# Altium PCB PCB3.PcbDoc
Units mm, origin at the board's own origin, x right, y up, seen from the top; angles counter-clockwise.
Board outline 100 x 50 mm, 2 copper layers (Top Layer, Bottom Layer); 107 components, 56 nets, 288 pads, 0 vias.
Unrouted connection lines stored in the file: 218.
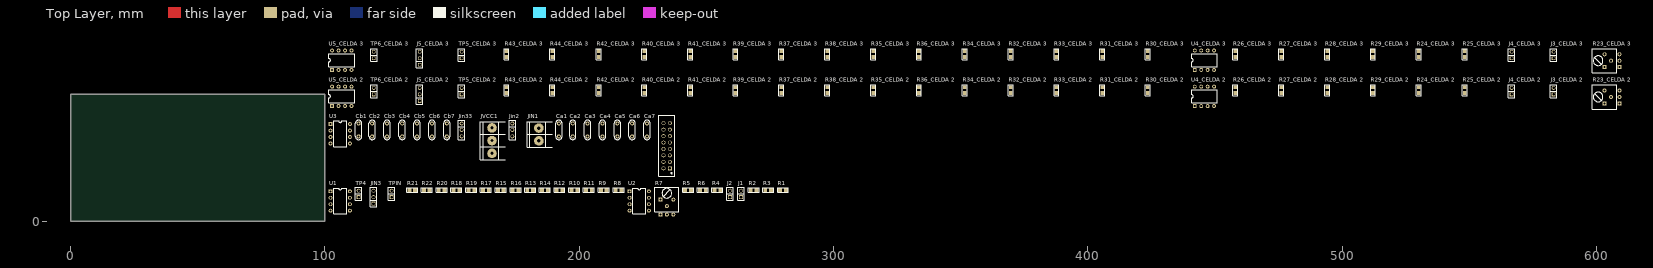
[diagram p0: Top Layer view]
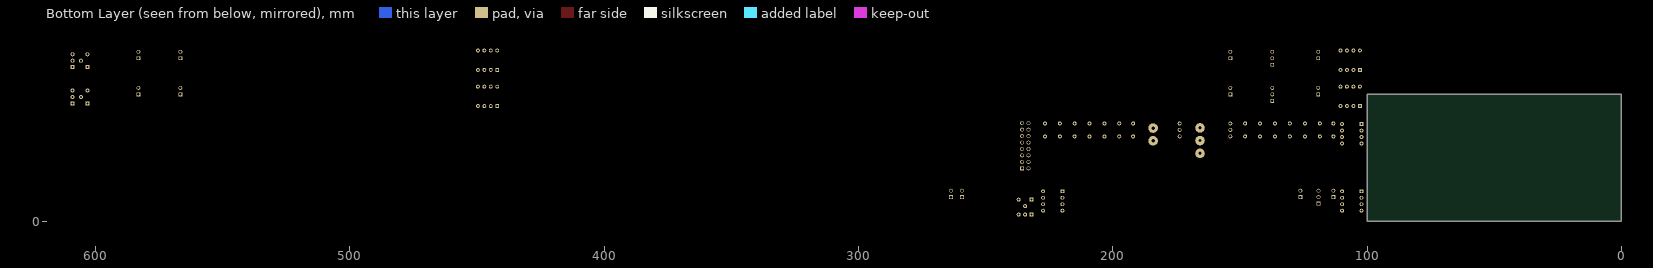
[diagram p1: Bottom Layer view, seen from below]

## Layer stack, top to bottom
Top Solder: solder mask 0.0102, Solder Resist, Dk 3.5
Top Layer: signal copper 0.0356
Dielectric 1: dielectric 0.32, FR-4, Dk 4.8
Bottom Layer: signal copper 0.0356
Bottom Solder: solder mask 0.0102, Solder Resist, Dk 3.5

## Board outline
0,0 0,50 100,50 100,0

## Design rules (kind name [scope] priority, off if disabled: settings)
Clearance [All] p1: gap=0.254 ignorepadtopadclearanceinfootprint=FALSE except(0: Arc-Hole Track-Hole SMDPad-Hole THPad-Hole Via-Hole Fill-Hole Poly-Hole Region-Hole Text-Hole)
PolygonConnect [All] p1: connectstyle=Relief reliefconductorwidth=0.254 reliefentries=4 polygonreliefangle="90 Angle" airgapwidth=0.254
RoomDefinition filter [InComponentClass('filter')] p1: confinementstyle=ConfineIn formatcopy=TRUE lockcomponents=FALSE outline 101.219,17.399 237.871,17.399 237.871,42.545 101.219,42.545
RoomDefinition "CELDA 3" [InComponentClass('CELDA 3')] p2: confinementstyle=ConfineIn formatcopy=TRUE lockcomponents=FALSE outline 101.092,58.166 615.315,58.166 615.315,70.993 101.092,70.993
RoomDefinition "CELDA 2" [InComponentClass('CELDA 2')] p3: confinementstyle=ConfineIn formatcopy=TRUE lockcomponents=FALSE outline 101.092,43.942 615.315,43.942 615.315,56.769 101.092,56.769
RoomDefinition "CELDA 1" [InComponentClass('CELDA 1')] p4: confinementstyle=ConfineIn formatcopy=TRUE lockcomponents=FALSE outline 101.219,1.651 282.575,1.651 282.575,16.129 101.219,16.129
RoutingVias [All] p1: holewidth=0.711 width=1.27 viastyle="Through Hole" minholewidth=0.711 minwidth=1.27 maxholewidth=0.711 maxwidth=1.27
SolderMaskExpansion [All] p1: expansion=0.102
Width [All] p1: maxlimit=0.254 minlimit=0.254 preferedwidth=0.254
30 further rules are at their usual default settings.

## Classes and differential pairs
channel class fleischerTowR3: "CELDA 2" "CELDA 3"
component class filter: Ca1 Ca2 Ca3 Ca4 Ca5 Ca6 Ca7 Cb1 Cb2 Cb3 Cb4 Cb5 Cb6 Cb7 JIN1 Jin2 Jin33 JVCC1 U3 ""
component class "CELDA 3": "J3_CELDA 3" "J4_CELDA 3" "J5_CELDA 3" "R23_CELDA 3" "R24_CELDA 3" "R25_CELDA 3" "R26_CELDA 3" "R27_CELDA 3" "R28_CELDA 3" "R29_CELDA 3" "R30_CELDA 3" "R31_CELDA 3" "R32_CELDA 3" "R33_CELDA 3" "R34_CELDA 3" "R35_CELDA 3" "R36_CELDA 3" "R37_CELDA 3" "R38_CELDA 3" "R39_CELDA 3" "R40_CELDA 3" "R41_CELDA 3" "R42_CELDA 3" "R43_CELDA 3" "R44_CELDA 3" "TP5_CELDA 3" "TP6_CELDA 3" "U4_CELDA 3" "U5_CELDA 3"
component class "CELDA 2": "J3_CELDA 2" "J4_CELDA 2" "J5_CELDA 2" "R23_CELDA 2" "R24_CELDA 2" "R25_CELDA 2" "R26_CELDA 2" "R27_CELDA 2" "R28_CELDA 2" "R29_CELDA 2" "R30_CELDA 2" "R31_CELDA 2" "R32_CELDA 2" "R33_CELDA 2" "R34_CELDA 2" "R35_CELDA 2" "R36_CELDA 2" "R37_CELDA 2" "R38_CELDA 2" "R39_CELDA 2" "R40_CELDA 2" "R41_CELDA 2" "R42_CELDA 2" "R43_CELDA 2" "R44_CELDA 2" "TP5_CELDA 2" "TP6_CELDA 2" "U4_CELDA 2" "U5_CELDA 2"
component class "CELDA 1": J1 J2 JIN3 R1 R2 R3 R4 R5 R6 R7 R8 R9 R10 R11 R12 R13 R14 R15 R16 R17 R18 R19 R20 R21 R22 TP4 TPIN U1 U2

## Components (designator, comment, footprint, x,y, rotation, side; value= is the part's Value field where it differs from the comment)
Ca1 "CAP" CAP200 192.024,35.941 r90 top
Ca2 "CAP" CAP200 197.485,35.941 r90 top
Ca3 "CAP" CAP200 203.327,35.941 r90 top
Ca4 "CAP" CAP200 209.169,35.941 r90 top
Ca5 "CAP" CAP200 215.011,35.941 r90 top
Ca6 "CAP" CAP200 220.853,35.941 r90 top
Ca7 "CAP" CAP200 226.695,35.941 r90 top
Cb1 "CAP" CAP200 113.284,35.941 r90 top
Cb2 "CAP" CAP200 118.618,35.941 r90 top
Cb3 "CAP" CAP200 124.46,35.941 r90 top
Cb4 "CAP" CAP200 130.429,35.941 r90 top
Cb5 "CAP" CAP200 136.271,35.941 r90 top
Cb6 "CAP" CAP200 142.113,35.941 r90 top
Cb7 "CAP" CAP200 147.955,35.941 r90 top
J1 "C2" SIP2 263.652,10.795 r90 top
J2 "C1" SIP2 259.334,10.795 r90 top
"J3_CELDA 2" "C2" SIP2 583.184,51.181 r90 top (schematic designator J3)
"J3_CELDA 3" "C2" SIP2 583.184,65.405 r90 top (schematic designator J3)
"J4_CELDA 2" "C1" SIP2 566.674,51.181 r90 top (schematic designator J4)
"J4_CELDA 3" "C1" SIP2 566.674,65.405 r90 top (schematic designator J4)
"J5_CELDA 2" "JUMPER" JUMPER3 137.287,49.911 r90 top (schematic designator J5)
"J5_CELDA 3" "JUMPER" JUMPER3 137.287,64.135 r90 top (schematic designator J5)
JIN1 "BORNERA 2" BORNERA2 184.15,34.163 r0 top
Jin2 "JUMPER" JUMPER3TH 173.736,38.481 r0 top
JIN3 "JUMPER" JUMPER3 119.126,9.525 r90 top
Jin33 "JUMPER" JUMPER3TH 153.797,38.481 r0 top
JVCC1 "BORNERA 3" BORNERA3 165.735,31.75 r0 top
R1 "RES" 0805 280.162,12.319 r0 top
R2 "RES" 0805 268.605,12.319 r0 top
R3 "RES" 0805 274.32,12.319 r0 top
R4 "RES" 0805 254.381,12.319 r0 top
R5 "RES" 0805 242.824,12.319 r0 top
R6 "RES" 0805 248.666,12.319 r0 top
R7 "PRESET" "PRESET H" 234.442,8.509 r0 top
R8 "RES" 0805 215.519,12.319 r0 top
R9 "RES" 0805 209.677,12.319 r0 top
R10 "RES" 0805 198.12,12.319 r0 top
R11 "RES" 0805 203.835,12.319 r0 top
R12 "RES" 0805 192.278,12.319 r0 top
R13 "RES" 0805 180.721,12.319 r0 top
R14 "RES" 0805 186.563,12.319 r0 top
R15 "RES" 0805 169.164,12.319 r0 top
R16 "RES" 0805 175.006,12.319 r0 top
R17 "RES" 0805 163.322,12.319 r0 top
R18 "RES" 0805 151.765,12.319 r0 top
R19 "RES" 0805 157.607,12.319 r0 top
R20 "RES" 0805 145.923,12.319 r0 top
R21 "RES" 0805 134.366,12.319 r0 top
R22 "RES" 0805 140.081,12.319 r0 top
"R23_CELDA 2" "PRESET" "PRESET H" 603.25,48.895 r90 top (schematic designator R23)
"R23_CELDA 3" "PRESET" "PRESET H" 603.25,63.119 r90 top (schematic designator R23)
"R24_CELDA 2" "RES" 0805 530.225,51.562 r90 top (schematic designator R24)
"R24_CELDA 3" "RES" 0805 530.225,65.786 r90 top (schematic designator R24)
"R25_CELDA 2" "RES" 0805 548.259,51.562 r90 top (schematic designator R25)
"R25_CELDA 3" "RES" 0805 548.259,65.786 r90 top (schematic designator R25)
"R26_CELDA 2" "RES" 0805 458.089,51.562 r90 top (schematic designator R26)
"R26_CELDA 3" "RES" 0805 458.089,65.786 r90 top (schematic designator R26)
"R27_CELDA 2" "RES" 0805 476.123,51.562 r90 top (schematic designator R27)
"R27_CELDA 3" "RES" 0805 476.123,65.786 r90 top (schematic designator R27)
"R28_CELDA 2" "RES" 0805 494.157,51.562 r90 top (schematic designator R28)
"R28_CELDA 3" "RES" 0805 494.157,65.786 r90 top (schematic designator R28)
"R29_CELDA 2" "RES" 0805 512.191,51.562 r90 top (schematic designator R29)
"R29_CELDA 3" "RES" 0805 512.191,65.786 r90 top (schematic designator R29)
"R30_CELDA 2" "RES" 0805 423.545,51.562 r90 top (schematic designator R30)
"R30_CELDA 3" "RES" 0805 423.545,65.786 r90 top (schematic designator R30)
"R31_CELDA 2" "RES" 0805 405.765,51.562 r90 top (schematic designator R31)
"R31_CELDA 3" "RES" 0805 405.765,65.786 r90 top (schematic designator R31)
"R32_CELDA 2" "RES" 0805 369.697,51.562 r90 top (schematic designator R32)
"R32_CELDA 3" "RES" 0805 369.697,65.786 r90 top (schematic designator R32)
"R33_CELDA 2" "RES" 0805 387.731,51.562 r90 top (schematic designator R33)
"R33_CELDA 3" "RES" 0805 387.731,65.786 r90 top (schematic designator R33)
"R34_CELDA 2" "RES" 0805 351.663,51.562 r90 top (schematic designator R34)
"R34_CELDA 3" "RES" 0805 351.663,65.786 r90 top (schematic designator R34)
"R35_CELDA 2" "RES" 0805 315.595,51.562 r90 top (schematic designator R35)
"R35_CELDA 3" "RES" 0805 315.595,65.786 r90 top (schematic designator R35)
"R36_CELDA 2" "RES" 0805 333.629,51.562 r90 top (schematic designator R36)
"R36_CELDA 3" "RES" 0805 333.629,65.786 r90 top (schematic designator R36)
"R37_CELDA 2" "RES" 0805 279.527,51.562 r90 top (schematic designator R37)
"R37_CELDA 3" "RES" 0805 279.527,65.786 r90 top (schematic designator R37)
"R38_CELDA 2" "RES" 0805 297.561,51.562 r90 top (schematic designator R38)
"R38_CELDA 3" "RES" 0805 297.561,65.786 r90 top (schematic designator R38)
"R39_CELDA 2" "RES" 0805 261.493,51.562 r90 top (schematic designator R39)
"R39_CELDA 3" "RES" 0805 261.493,65.786 r90 top (schematic designator R39)
"R40_CELDA 2" "RES" 0805 225.679,51.562 r90 top (schematic designator R40)
"R40_CELDA 3" "RES" 0805 225.679,65.786 r90 top (schematic designator R40)
"R41_CELDA 2" "RES" 0805 243.713,51.562 r90 top (schematic designator R41)
"R41_CELDA 3" "RES" 0805 243.713,65.786 r90 top (schematic designator R41)
"R42_CELDA 2" "RES" 0805 207.645,51.562 r90 top (schematic designator R42)
"R42_CELDA 3" "RES" 0805 207.645,65.786 r90 top (schematic designator R42)
"R43_CELDA 2" "RES" 0805 171.45,51.562 r90 top (schematic designator R43)
"R43_CELDA 3" "RES" 0805 171.45,65.786 r90 top (schematic designator R43)
"R44_CELDA 2" "RES" 0805 189.484,51.562 r90 top (schematic designator R44)
"R44_CELDA 3" "RES" 0805 189.484,65.786 r90 top (schematic designator R44)
TP4 "JUMPER" JUMPER2 113.284,10.795 r90 top
"TP5_CELDA 2" "JUMPER" JUMPER2 153.797,51.181 r90 top (schematic designator TP5)
"TP5_CELDA 3" "JUMPER" JUMPER2 153.797,65.405 r90 top (schematic designator TP5)
"TP6_CELDA 2" "JUMPER" JUMPER2 119.253,51.181 r90 top (schematic designator TP6)
"TP6_CELDA 3" "JUMPER" JUMPER2 119.253,65.405 r90 top (schematic designator TP6)
TPIN "JUMPER" JUMPER2 126.238,10.795 r90 top
U1 "LM833" DIP8 102.235,11.811 r0 top
U2 "LM833" DIP8 219.837,11.811 r0 top
U3 "LM833" DIP8 102.235,38.227 r0 top
"U4_CELDA 2" "LM833" DIP8 442.087,45.339 r90 top (schematic designator U4)
"U4_CELDA 3" "LM833" DIP8 442.087,59.563 r90 top (schematic designator U4)
"U5_CELDA 2" "LM833" DIP8 102.87,45.339 r90 top (schematic designator U5)
"U5_CELDA 3" "LM833" DIP8 102.87,59.563 r90 top (schematic designator U5)
? "OUTPUT" SIP8*2 235.712,20.828 r90 top

## Footprints (in the part's own frame and the unit in brackets; to place one, negate y for a bottom-side part, rotate by r counter-clockwise, add the part's x,y. Pads: shape width x height; smd on the part's side, far side on the other; paste and mask are expansions set on the pad)
0805 [mil] "Pasivo 0805"
  rect 60x56 smd: 1(-45,0) 2(45,0)
  silkscreen extent -85,-38 85,38, body extent -40,-24 39,25, height 15
BORNERA2 [mm] "Bornera con Tornillos 5mm separación"
  round 3.75 hole 1.3: 1(0,2.5) 2(0,-2.5)
  silkscreen extent -4.6,-5 5.2,5, body extent -3.76,-4.89 3.94,5.61, height 10
BORNERA3 [mm] "Bornera con Tornillos 5mm separación"
  round 3.75 hole 1.3: 1(0,5) 2(0,0) 3(0,-5)
  silkscreen extent -4.6,-7.5 5.2,7.5, body extent -3.76,-7.39 3.94,8.11, height 10.05
CAP200 [mil]
  round 62 hole 32: 1(-100,0) 2(100,0)
  silkscreen extent -150,-50 150,50, body extent -110,-46 110,44, height 246
DIP8 [mil]
  rect 60x60 hole 32: 1(0,0)
  round 60 hole 32: 2(0,-100) 3(0,-200) 4(0,-300) 5(300,-300) 6(300,-200) 7(300,-100) 8(300,0)
  silkscreen extent 50,-350 250,50, body extent -3,-363 303,63, height 177
JUMPER2 [mm]
  rect 1.5x1.5 hole 1.016: 1(-1.27,0)
  round 1.5 hole 1.016: 2(1.27,0)
  silkscreen extent -2.54,-1.27 2.54,1.27, body extent -2.46,-1.27 2.54,1.27, height 9.5
JUMPER3 [mm]
  rect 1.5x1.5 hole 1.016: 1(-2.54,0)
  round 1.5 hole 1.016: 2(0,0) 3(2.54,0)
  silkscreen extent -3.81,-1.27 3.81,1.27, body extent -3.81,-1.3 3.81,1.27, height 16.15
JUMPER3TH [mil]
  round 60 hole 38: 1(0,0) 2(0,-100) 3(0,-200)
  silkscreen extent -50,-250 50,50, body extent -49,-250 51,50, height 330
"PRESET H" [mil]
  rect 62x62 hole 32: 1(-98.43,-230) 1(-98.42,0)
  round 62 hole 32: 2(1.57,-230) 2(1.57,-100) 3(101.57,-230) 3(101.57,0)
  silkscreen extent -186,-185 189,190, body extent -190,-188 185,188, height 197
SIP2 [mm]
  rect 1.5x1.5 hole 1.016: 1(-1.27,0)
  round 1.5 hole 1.016: 2(1.27,0)
  silkscreen extent -2.54,-1.27 2.54,1.27
SIP8*2 [mm]
  rect 1.5x1.5 hole 1.016: 1(0,0)
  round 1.5 hole 1.016: 2(0,2.54) 3(2.54,0) 4(2.54,2.54) 5(5.08,0) 6(5.08,2.54) 7(7.62,0) 8(7.62,2.54) 9(10.16,0) 10(10.16,2.54) 11(12.7,0) 12(12.7,2.54) 13(15.24,0) 14(15.24,2.54) 15(17.78,0) 16(17.78,2.54)
  silkscreen extent -3.18,-1.91 20.95,4.45, body extent -1.26,-1.3 19.06,3.78, height 10.1

## Part data
J1 J2 "J3_CELDA 2" "J3_CELDA 3" "J4_CELDA 2" "J4_CELDA 3": library part CON2
"J5_CELDA 2" "J5_CELDA 3" JIN3: library part JUMPER3
Jin2 Jin33: library part JUMPER3TH, "TIRA DE PINES 1x3"
U1 U2 U3 "U4_CELDA 2" "U4_CELDA 3" "U5_CELDA 2" "U5_CELDA 3": "Dual Audio Operational Amplifier"
?: library part CON8*2

## Nets (pads, with @x,y where several pads share a name; then routed paths per layer and width w, separated by ;. In a path a pad name is that pad's centre, name@x,y a point inside that pad or via, vN(x,y) a via of type N, cw(c..) or ccw(c..) an arc to the next point about the centre after c; other vN are vias at no path point)
GND: "U4_CELDA 2.3" "U4_CELDA 2.5" "U4_CELDA 3.3" "U4_CELDA 3.5" "U5_CELDA 2.5" "U5_CELDA 3.5" ?.13 ?.14 ?.15 ?.16 Ca1.2 Ca2.2 Ca3.2 Ca4.2 Ca5.2 Ca6.2 Ca7.2 Cb1.2 Cb2.2 Cb3.2 Cb4.2 Cb5.2 Cb6.2 Cb7.2 JIN1.2 JVCC1.2 U1.5 U2.3 U2.5 U3.5
NetCb2_1: Cb2.1 Cb3.1 Cb4.1 Cb5.1 Cb6.1 Cb7.1
NetJ1_1: J1.1 R8.2 R11.2 R20.2 R22.2 U2.2
NetJ1_2: J1.2 R1.2 R3.2 U2.1
NetJ2_1: J2.1 R1.1 R2.1
NetJ2_2: J2.2 R7.3
"NetJ3_CELDA 2_1": "J3_CELDA 2.1" "R30_CELDA 2.2" "R33_CELDA 2.2" "R42_CELDA 2.2" "R44_CELDA 2.2" "U4_CELDA 2.2"
"NetJ3_CELDA 2_2": "J3_CELDA 2.2" "R23_CELDA 2.3" "U4_CELDA 2.1"
"NetJ3_CELDA 3_1": "J3_CELDA 3.1" "R30_CELDA 3.2" "R33_CELDA 3.2" "R42_CELDA 3.2" "R44_CELDA 3.2" "U4_CELDA 3.2"
"NetJ3_CELDA 3_2": "J3_CELDA 3.2" "R23_CELDA 3.3" "U4_CELDA 3.1"
"NetJ4_CELDA 2_1": "J4_CELDA 2.1" "R23_CELDA 2.2" "R24_CELDA 2.1" "R26_CELDA 2.1" "R34_CELDA 2.2" "R38_CELDA 2.2" "U5_CELDA 2.6"
"NetJ4_CELDA 2_2": "J4_CELDA 2.2" "R24_CELDA 2.2" "R27_CELDA 2.2"
"NetJ4_CELDA 3_1": "J4_CELDA 3.1" "R23_CELDA 3.2" "R24_CELDA 3.1" "R26_CELDA 3.1" "R34_CELDA 3.2" "R38_CELDA 3.2" "U5_CELDA 3.6"
"NetJ4_CELDA 3_2": "J4_CELDA 3.2" "R24_CELDA 3.2" "R27_CELDA 3.2"
"NetJ5_CELDA 2_1": "J5_CELDA 2.1" "TP6_CELDA 2.1" "TP6_CELDA 2.2" "U5_CELDA 2.1" "U5_CELDA 2.2"
"NetJ5_CELDA 3_1": "J5_CELDA 3.1" "TP6_CELDA 3.1" "TP6_CELDA 3.2" "U5_CELDA 3.1" "U5_CELDA 3.2"
NetJIN3_1: JIN3.1 TP4.1 TP4.2 U1.1 U1.2
NetR2_2: R2.2 R3.1
NetR4_1: R4.1 R5.1 R9.2 R14.2 R17.2 R19.2 U2.6
NetR5_2: R5.2 R6.1
NetR7_2: R7.2 R12.2 R16.2 U1.6
NetR9_1: R9.1 R13.1 U1.7
NetR10_2: R10.2 R11.1
NetR13_2: R13.2 R14.1
NetR15_2: R15.2 R16.1
NetR18_2: R18.2 R19.1
NetR21_2: R21.2 R22.1
"NetR25_CELDA 2_1": "R25_CELDA 2.1" "R28_CELDA 2.1" "R31_CELDA 2.2" "R36_CELDA 2.2" "R39_CELDA 2.2" "R41_CELDA 2.2" "U4_CELDA 2.6"
"NetR25_CELDA 3_1": "R25_CELDA 3.1" "R28_CELDA 3.1" "R31_CELDA 3.2" "R36_CELDA 3.2" "R39_CELDA 3.2" "R41_CELDA 3.2" "U4_CELDA 3.6"
"NetR26_CELDA 2_2": "R26_CELDA 2.2" "R27_CELDA 2.1"
"NetR26_CELDA 3_2": "R26_CELDA 3.2" "R27_CELDA 3.1"
"NetR28_CELDA 2_2": "R28_CELDA 2.2" "R29_CELDA 2.1"
"NetR28_CELDA 3_2": "R28_CELDA 3.2" "R29_CELDA 3.1"
"NetR31_CELDA 2_1": "R31_CELDA 2.1" "R35_CELDA 2.1" "U5_CELDA 2.7"
"NetR31_CELDA 3_1": "R31_CELDA 3.1" "R35_CELDA 3.1" "U5_CELDA 3.7"
"NetR32_CELDA 2_2": "R32_CELDA 2.2" "R33_CELDA 2.1"
"NetR32_CELDA 3_2": "R32_CELDA 3.2" "R33_CELDA 3.1"
"NetR35_CELDA 2_2": "R35_CELDA 2.2" "R36_CELDA 2.1"
"NetR35_CELDA 3_2": "R35_CELDA 3.2" "R36_CELDA 3.1"
"NetR37_CELDA 2_2": "R37_CELDA 2.2" "R38_CELDA 2.1"
"NetR37_CELDA 3_2": "R37_CELDA 3.2" "R38_CELDA 3.1"
"NetR40_CELDA 2_2": "R40_CELDA 2.2" "R41_CELDA 2.1"
"NetR40_CELDA 3_2": "R40_CELDA 3.2" "R41_CELDA 3.1"
"NetR43_CELDA 2_2": "R43_CELDA 2.2" "R44_CELDA 2.1"
"NetR43_CELDA 3_2": "R43_CELDA 3.2" "R44_CELDA 3.1"
NetU3_6: U3.6 U3.7
VCC: "U4_CELDA 2.8" "U4_CELDA 3.8" "U5_CELDA 2.8" "U5_CELDA 3.8" Ca1.1 Ca2.1 Ca3.1 Ca4.1 Ca5.1 Ca6.1 Ca7.1 JVCC1.1 U1.8 U2.8 U3.8
VEE: "U4_CELDA 2.4" "U4_CELDA 3.4" "U5_CELDA 2.4" "U5_CELDA 3.4" Cb1.1 JVCC1.3 U1.4 U2.4 U3.4
Vi2: "J5_CELDA 2.3" "TP5_CELDA 2.1" "TP5_CELDA 2.2" "U5_CELDA 2.3" Jin2.2
Vi3: "J5_CELDA 3.3" "TP5_CELDA 3.1" "TP5_CELDA 3.2" "U5_CELDA 3.3" Jin33.2
VIN: JIN1.1 Jin2.1 JIN3.3 Jin33.1 TPIN.1 TPIN.2 U1.3
VinFT: "J5_CELDA 2.2" "J5_CELDA 3.2" "R34_CELDA 2.1" "R34_CELDA 3.1" "R37_CELDA 2.1" "R37_CELDA 3.1" "R39_CELDA 2.1" "R39_CELDA 3.1" "R40_CELDA 2.1" "R40_CELDA 3.1" "R42_CELDA 2.1" "R42_CELDA 3.1" "R43_CELDA 2.1" "R43_CELDA 3.1" JIN3.2 R12.1 R15.1 R17.1 R18.1 R20.1 R21.1
Vo1: Jin2.3 R4.2 R6.2 R8.1 R10.1 U2.7
Vo2: "R25_CELDA 2.2" "R29_CELDA 2.2" "R30_CELDA 2.1" "R32_CELDA 2.1" "U4_CELDA 2.7" Jin33.3
Vo3: "R25_CELDA 3.2" "R29_CELDA 3.2" "R30_CELDA 3.1" "R32_CELDA 3.1" "U4_CELDA 3.7" ?.7 ?.8 U3.3
VOUT: ?.1 ?.2 U3.1 U3.2
pads on no net: "R23_CELDA 2.1" "R23_CELDA 3.1" ?.3 ?.4 ?.5 ?.6 ?.9 ?.10 ?.11 ?.12 R7.1